# Altium PCB Seadream_PCB.PcbDoc
Units mil, origin at the board's own origin, x right, y up, seen from the top; angles counter-clockwise.
Board outline 2935 x 2105 mil, 4 copper layers (Top Layer, GND, 3V3, Bottom Layer), stack 23.756 mil thick; 61 components, 45 nets, 250 pads, 9 vias.
Unrouted connection lines stored in the file: 50.
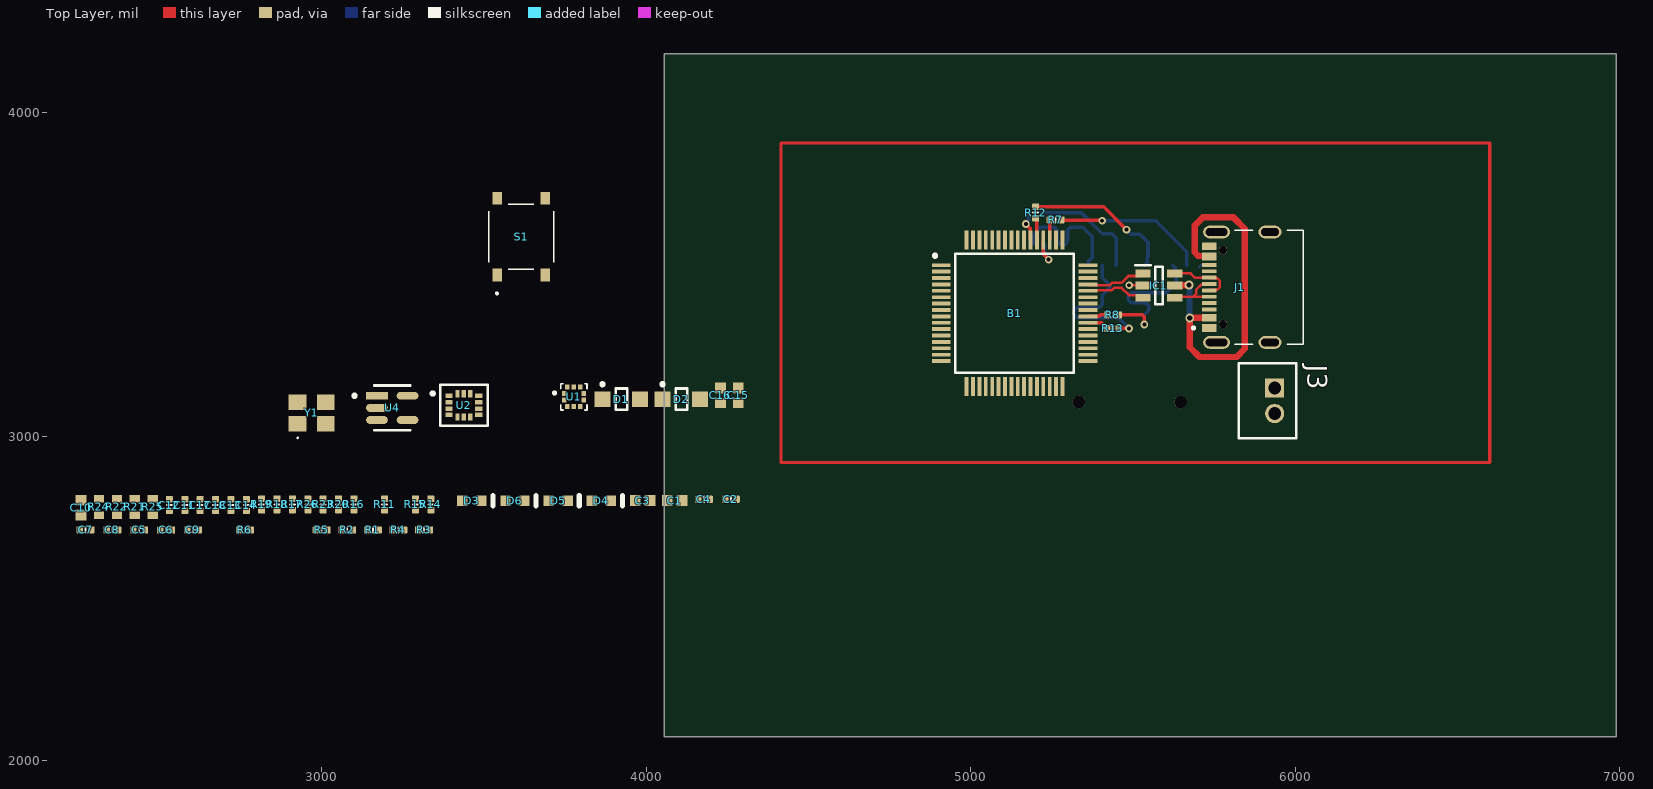
[diagram p0: Top Layer view]
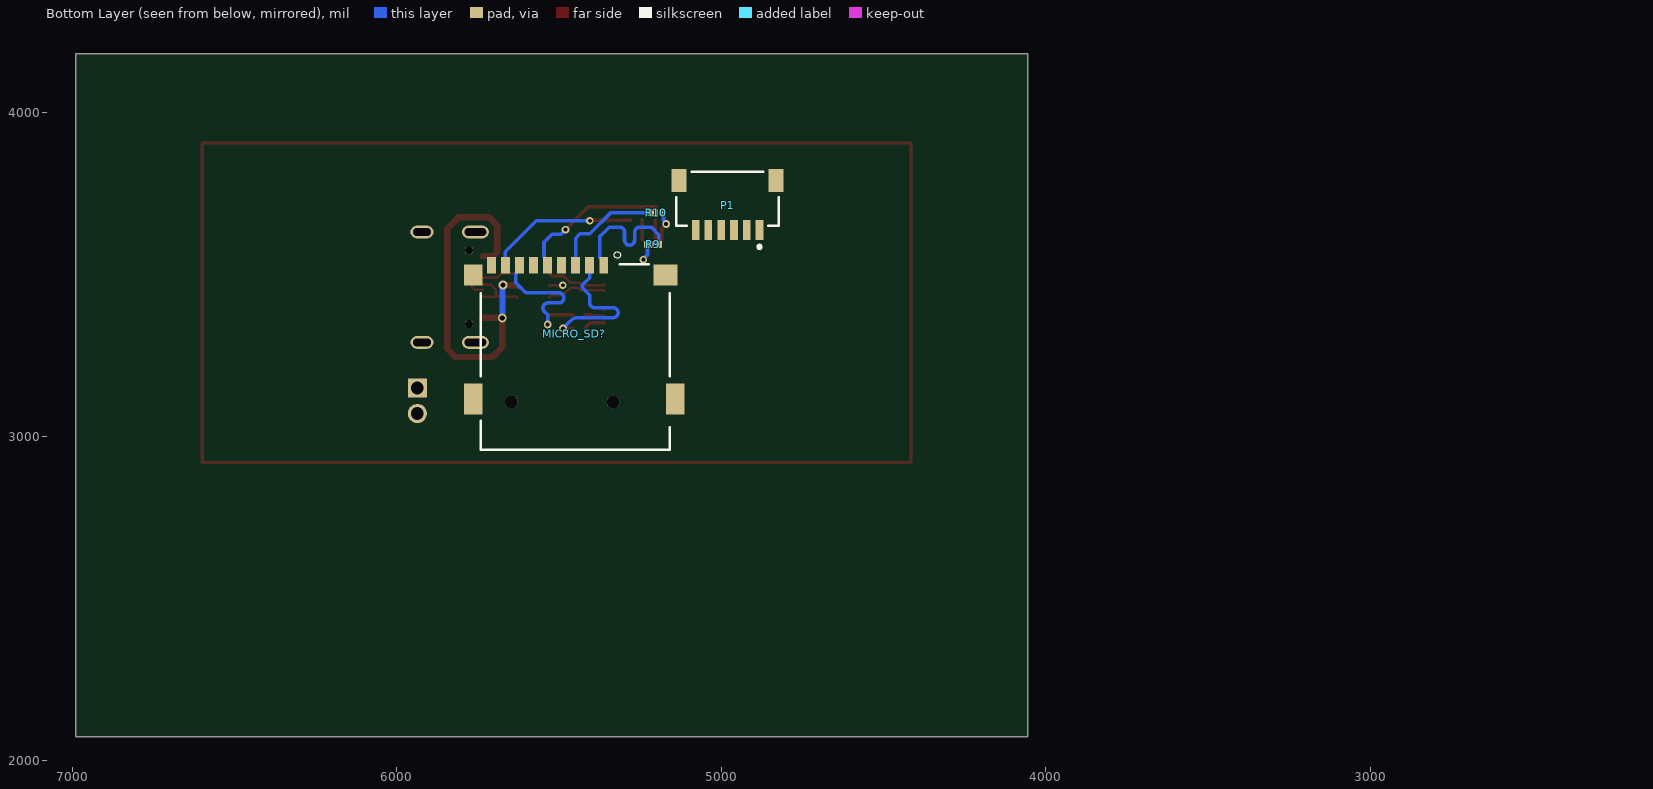
[diagram p1: Bottom Layer view, seen from below]
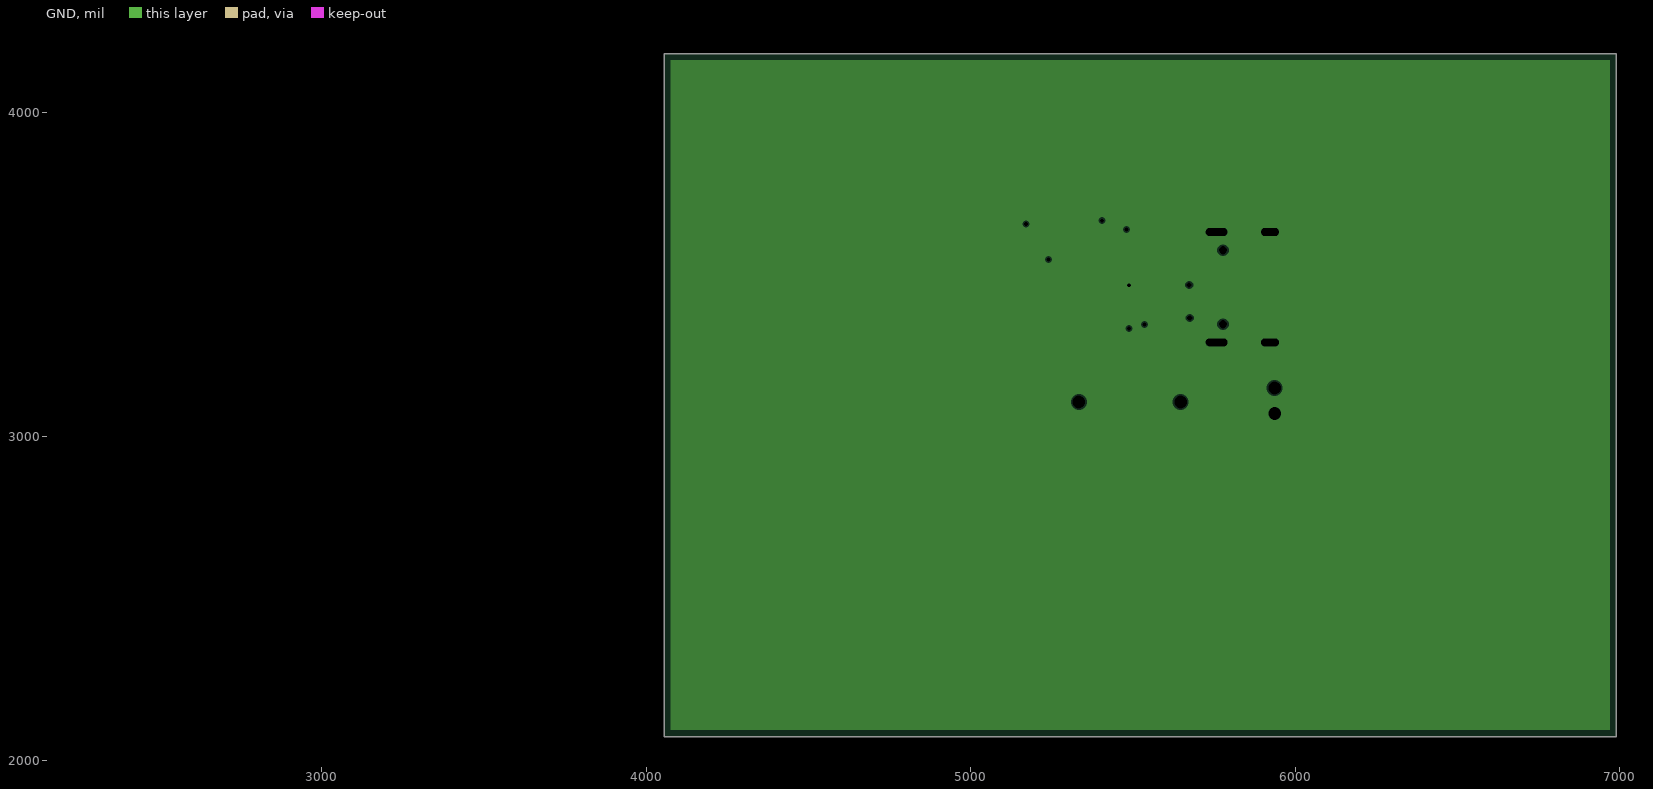
[diagram p2: GND, clearances drawn from the general rule]
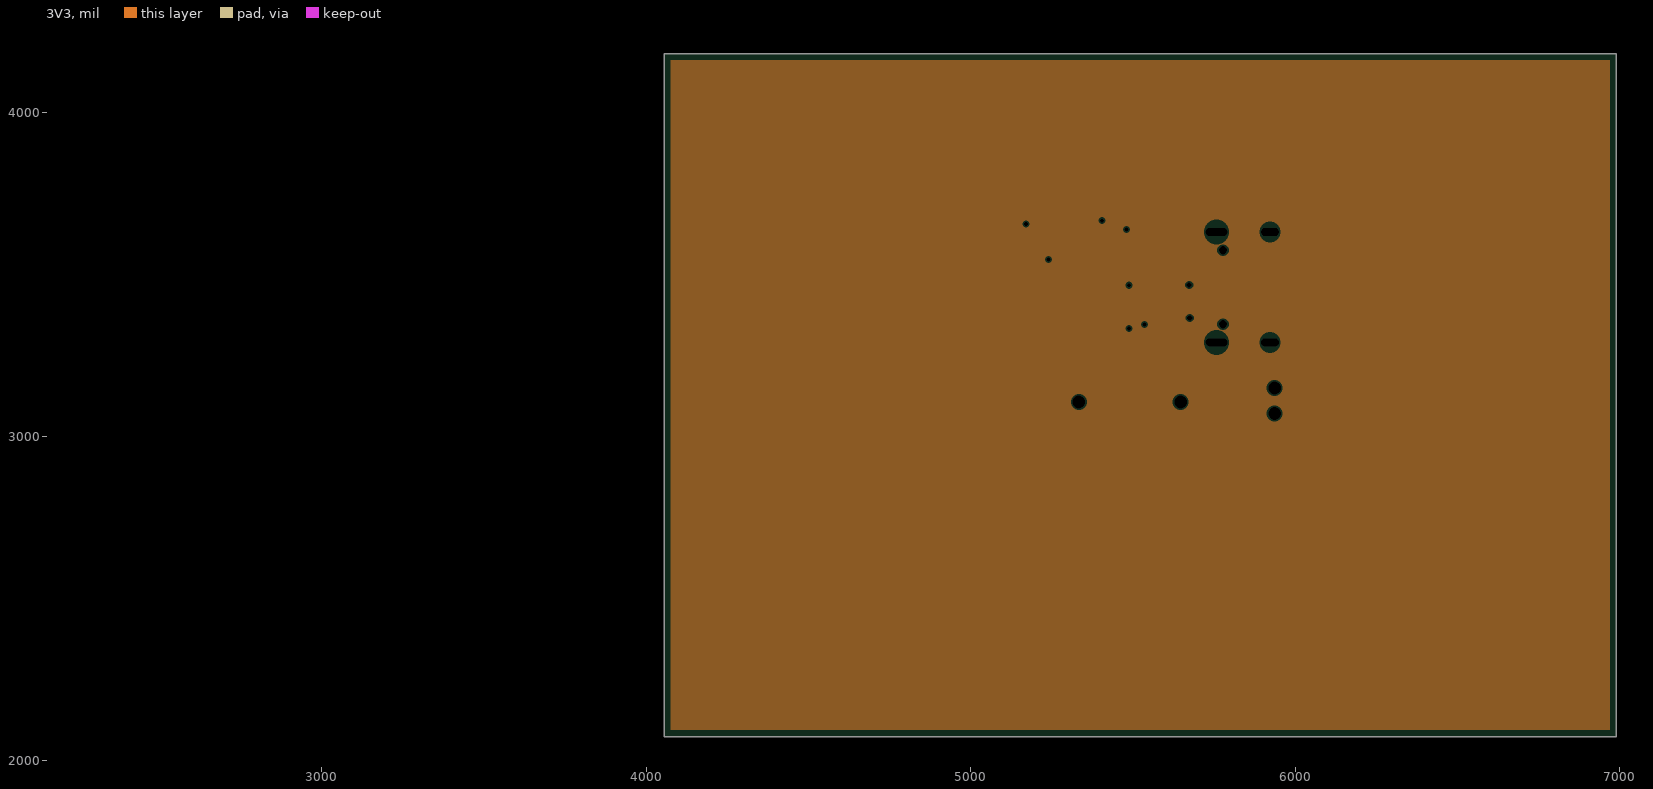
[diagram p3: 3V3, clearances drawn from the general rule]

## Layer stack, top to bottom
Top Solder: solder mask 0.4, Solder Resist, Dk 3.5
Top Layer: signal copper 1.4
Dielectric 2: prepreg 2.8, PP-006, Dk 4.1
GND: plane copper 1.378, net GND
Dielectric 1: dielectric 12.6, FR-4, Dk 4.8
3V3: plane copper 1.378, net 3V3
Dielectric 3: prepreg 2.8, PP-006, Dk 4.1
Bottom Layer: signal copper 1.4
Bottom Solder: solder mask 0.4, Solder Resist, Dk 3.5

## Board outline
4055,2075 4055,4180 6990,4180 6990,2075

## Design rules (kind name [scope] priority, off if disabled: settings)
BoardOutlineClearance [All] p1: gap=7.87 ignorepadtopadclearanceinfootprint=FALSE
Clearance SDMMC_1 [InNetClass('SDMMC')] p1: gap=8 ignorepadtopadclearanceinfootprint=TRUE except(9.84: Arc-Hole Track-Hole SMDPad-Hole THPad-Hole Via-Hole Fill-Hole Poly-Hole Region-Hole Text-Hole)
Clearance PWR_Clear [InNetClass('PWR')] p2: gap=8 ignorepadtopadclearanceinfootprint=TRUE except(9.84: Arc-Hole Track-Hole SMDPad-Hole THPad-Hole Via-Hole Fill-Hole Poly-Hole Region-Hole Text-Hole)
Clearance [All] p3: gap=6 ignorepadtopadclearanceinfootprint=TRUE except(9.84: Arc-Hole Track-Hole SMDPad-Hole THPad-Hole Via-Hole Fill-Hole Poly-Hole Region-Hole Text-Hole)
ComponentClearance [All] p1: gap=5 collisioncheckmode=3 verticalgap=5 showdistances=TRUE
DiffPairsRouting [All] p1: maxlimit=11.81 minlimit=7.09 mostfreqgap=7.09 toplayer_minwidth=7.87 toplayer_maxwidth=7.87 toplayer_prefwidth=7.87 bottomlayer_mingap=7.09 bottomlayer_minwidth=7.87 bottomlayer_maxwidth=7.87 bottomlayer_prefwidth=7.87 maxuncoupledlength=196.85
Height [All] p1: minheight=0 maxheight=71497.94 prefheight=500
HoleSize [All] p1: absolutevalues=TRUE maxlimit=248.03 minlimit=11.81 maxpercent=80.000 minpercent=20.000
HoleToHoleClearance [All] p1: gap=9.84 allowstackedmicrovias=FALSE
MatchedLengths USB_LENGTH [InxSignalClass('SDMMC')] p1: tolerance=3.94 checknetsindiffpair=FALSE checkdiffpairvsdiffpair=TRUE checkxsignals=TRUE checkothers=TRUE
MatchedLengths [InxSignalClass('SDMMC')] p2: tolerance=39.37 checknetsindiffpair=FALSE checkdiffpairvsdiffpair=TRUE checkxsignals=TRUE checkothers=TRUE
MinimumAnnularRing [All] p1: minimumring=3
MinimumSolderMaskSliver [All] p1: minsoldermaskwidth=0
PlaneClearance [All] p1: clearance=5
PlaneConnect PlaneConnectPowerPads [InPadClass('PowerPads')] p1: planeconnectstyle=Direct reliefexpansion=20 reliefentries=4 reliefconductorwidth=10 reliefairgap=10
PlaneConnect [All] p2: pad.planeconnectstyle=Relief pad.reliefexpansion=11.81 pad.reliefentries=4 pad.reliefconductorwidth=5 pad.reliefairgap=5 via.planeconnectstyle=Direct via.reliefexpansion=11.81 via.reliefentries=4 via.reliefconductorwidth=5 via.reliefairgap=5
PolygonConnect PolygonConnectPowerPads [All vs (InPadClass('PowerPads'))] p1: connectstyle=Direct reliefconductorwidth=10 reliefentries=4 polygonreliefangle="90 Angle" airgapwidth=10
PolygonConnect [All] p2: connectstyle=Relief reliefconductorwidth=5 reliefentries=4 polygonreliefangle="90 Angle" conductorbypadedge=TRUE mindistance=15 enablemindistance=FALSE airgapwidth=5
RoutingVias PWR_Vias [InNetClass('PWR')] p1: holewidth=15.75 width=27.56 viastyle="Through Hole" minholewidth=15.75 minwidth=27.56 maxholewidth=28 maxwidth=50
RoutingVias [All] p2: holewidth=11.81 width=23.62 viastyle="Through Hole" minholewidth=11.81 minwidth=23.62 maxholewidth=23.62 maxwidth=259.84
SilkToSilkClearance [All] p1: silktosilkclearance=0
SilkToSolderMaskClearance [IsPad] p1: minsilkscreentomaskgap=5 clearancetoexposedcopper=TRUE
SolderMaskExpansion [All] p1: expansion=2.95 istentingtop=FALSE
SupplyNets "Schematic Supply Nets_3" [InNet('GND')] p1: voltage=0.000
SupplyNets "Schematic Supply Nets_2" [InNet('VBAT')] p2: voltage=0.000
SupplyNets "Schematic Supply Nets_1" [InNet('3V3')] p3: voltage=0.000
SupplyNets "Schematic Supply Nets" [InNet('VIN')] p4: voltage=0.000
Width SDMMC [InNetClass('SDMMC')] p1: maxlimit=13.78 minlimit=9.84 preferedwidth=11.02 toplayer_minwidth=9.84 toplayer_maxwidth=13.78 toplayer_prefwidth=11.02 minimp=50.000000 maximp=50.000000 favimp=50.000000
Width PWR_Width [InNetClass('PWR')] p2: maxlimit=39.37 minlimit=11.81 preferedwidth=19.68 bottomlayer_maxwidth=39.37 minimp=50.000000 maximp=50.000000 favimp=50.000000
Width [All] p3: maxlimit=11.81 minlimit=5.91 preferedwidth=7.87 minimp=50.000000 maximp=50.000000 favimp=50.000000
20 further rules are at their usual default settings.

## Classes and differential pairs
net class SDMMC: CLK CMD DAT0 DAT1 DAT2 DAT3 SD_CK SD_CMD SD_D0 SD_D1 SD_D2 SD_D3
net class PWR: VBAT VIN
differential pair USB: +USB_P -USB_N
differential pair STM_USB: +STM_USB_P -STM_USB_N

## Components (designator, comment, footprint, x,y, rotation, side; value= is the part's Value field where it differs from the comment)
B1 "STM32U575RGT6" QFP50P1200X1200X160-64N 5135,3380 r0 top
C1 "Capacitor" CAPC1608X90X40LL10T20 4087.01,2802.45 r0 top value=2.2u
C2 "Capacitor" CAPC0402(1005)60_L 4260.55,2806.39 r0 top value=100n
C3 "Capacitor" CAPC1608X90X40LL10T20 3988.42,2802.45 r0 top value=4.7u
C4 "Capacitor" CAPC0402(1005)60_L 4177.71,2806.39 r0 top value=100n
C5 "Capacitor" CAPC0402(1005)60_L 2437.09,2711.74 r0 top value=100n
C6 "Capacitor" CAPC0402(1005)60_L 2519.92,2711.74 r0 top value=100n
C7 "Capacitor" CAPC0402(1005)60_L 2271.42,2711.74 r0 top value=100n
C8 "Capacitor" CAPC0402(1005)60_L 2354.25,2711.74 r0 top value=100n
C9 "Capacitor" CAPC0402(1005)60_L 2602.76,2711.74 r0 top value=100n
C10 "Capacitor" CAPC1608X90X40LL10T20 2257.64,2780.8 r90 top value=2.2u
C11 "Capacitor" CAPC0402(1005)60_L 2577.48,2788.67 r90 top value=100n
C12 "Capacitor" CAPC0402(1005)60_L 2530.08,2788.67 r90 top value=100n
C13 "Capacitor" CAPC0402(1005)60_L 2719.68,2788.67 r90 top value=100n
C14 "Capacitor" CAPC0402(1005)60_L 2767.09,2788.67 r90 top value=100n
C15 "Capacitor" CAPC1608X90X40LL10T20 4283.55,3126.43 r90 top value=4.7u
C16 "Capacitor" CAPC1608X90X40LL10T20 4228.28,3126.43 r90 top value=2.2u
C17 "Capacitor" CAPC0402(1005)60_L 2624.88,2788.67 r90 top value=18p
C18 "Capacitor" CAPC0402(1005)60_L 2672.28,2788.67 r90 top value=18p
D1 "SMF5.0AT1G" ONSC-SOD-123FL-2-498_V 3922.84,3115.2 r0 top
D2 "SMF5.0AT1G" ONSC-SOD-123FL-2-498_V 4108.04,3115.2 r0 top
D3 "Light-Emitting Diode" LTST-C191KRKT_V 3462.2,2801.47 r0 top
D4 "Light-Emitting Diode" LTST-C191KRKT_V 3861.3,2801.47 r0 top
D5 "Light-Emitting Diode" LTST-C191KRKT_V 3728.27,2801.47 r0 top
D6 "Light-Emitting Diode" LTST-C191KRKT_V 3595.23,2801.47 r0 top
IC1 "USBLC6-2SC6" SOT95P280X145-6N 5580,3465 r0 top
J1 "TYPE-C_16PIN_2MD_(073)" SHOUHAN_TYPE-C_16PIN_2MD_(073) 5880,3460 r90 top
J3 "B2B-PH-K-S(LF)(SN)" JST-B2B-PH-K-S_V 5915,3110 r270 top
MICRO_SD? "TF-01A" TF-01A 5450,3245 r180 bottom
P1 "SM06B-SRSS-TB(LF)(SN)" JST-SM06B-SRSS-TB_V 4980.59,3732.81 r0 bottom
R1 "Resistor" RESC0402(1005)_L 3157.01,2711.74 r0 top value=10k
R2 "Resistor" RESC0402(1005)_L 3078.11,2711.74 r0 top value=10k
R3 "Resistor" RESC0402(1005)_L 3314.8,2711.74 r0 top value=10k
R4 "Resistor" RESC0402(1005)_L 3235.91,2711.74 r0 top value=10k
R5 "Resistor" RESC0402(1005)_L 2999.21,2711.74 r0 top value=10k
R6 "Resistor" RESC0402(1005)_L 2762.52,2711.74 r0 top value=10k
R7 "Resistor" RESC0402(1005)_L 5261.7,3667.48 r180 top value=22
R8 "Resistor" RESC0402(1005)_L 5438.23,3374.91 r0 top value=22
R9 "Resistor" RESC0402(1005)_L 5209.82,3592.07 r0 bottom value=22
R10 "Resistor" RESC0402(1005)_L 5200,3690 r180 bottom value=22
R11 "Resistor" RESC0402(1005)_L 3193.7,2790.64 r90 top value=5k1
R12 "Resistor" RESC0402(1005)_L 5200,3690 r270 top value=22
R13 "Resistor" RESC0402(1005)_L 5438.23,3332.95 r180 top value=22
R14 "Resistor" RESC0402(1005)_L 3335.9,2790.64 r90 top value=5k1
R15 "Resistor" RESC0402(1005)_L 3288.5,2790.64 r90 top value=4k7
R16 "Resistor" RESC0402(1005)_L 3098.9,2790.64 r90 top value=4k7
R17 "Resistor" RESC0402(1005)_L 2909.29,2790.64 r90 top value=22
R18 "Resistor" RESC0402(1005)_L 2861.89,2790.64 r90 top value=10k
R19 "Resistor" RESC0402(1005)_L 2814.49,2790.64 r90 top value=22
R20 "Resistor" RESC0402(1005)_L 3051.5,2790.64 r90 top value=22
R21 "Resistor" RESC1608X55X25LL10T15 2423.46,2782.76 r90 top value=470
R22 "Resistor" RESC1608X55X25LL10T15 2368.19,2782.76 r90 top value=470
R23 "Resistor" RESC0402(1005)_L 3004.09,2790.64 r90 top value=10k
R24 "Resistor" RESC1608X55X25LL10T15 2312.91,2782.76 r90 top value=470
R25 "Resistor" RESC1608X55X25LL10T15 2478.74,2782.76 r90 top value=470
R26 "Resistor" RESC0402(1005)_L 2956.69,2790.64 r90 top value=10k
S1 "TS-1187A-B-A-B" TS1187ABAB 3614.16,3615.87 r90 top
U1 "BMP388" PQFN50P200X200X80-10N 3776.62,3122.09 r0 top
U2 "LSM6DSO32TR" FP-LGA-14L-DM00249496-MFG 3437.72,3095.91 r0 top
U4 "AP2112K-3.3TRG1" FP-SOT25-IPC_A 3216.93,3088.04 r0 top
Y1 "X32258MOB4SI" X32258MOB4SI 2968.58,3072.29 r0 top

## Footprints (in the part's own frame and the unit in brackets; to place one, negate y for a bottom-side part, rotate by r counter-clockwise, add the part's x,y. Pads: shape width x height; smd on the part's side, far side on the other; paste and mask are expansions set on the pad)
CAPC0402(1005)60_L [mm] "Chip Capacitor, Body 1.0x0.5mm, Height 0.6mm, IPC High Density"
  rrect25% 0.5x0.55 smd: 1(-0.45,0) 2(0.45,0)
  silkscreen extent 0,-0.2 0,0.2, body extent -0.5,-0.25 0.5,0.25, height 0.6
CAPC1608X90X40LL10T20 [mm] "Chip Capacitor, 2-Leads, Body 1.70x0.90mm, IPC High Density"
  rect 0.85x0.85 smd: 1(-0.575,0) 2(0.575,0)
  body extent -0.85,-0.45 0.85,0.45, height 0.9
FP-LGA-14L-DM00249496-MFG [mm]
  rect 0.575x0.35 smd paste-1000 mask+0: 1(-1.162,0.75) 2(-1.162,0.25) 3(-1.162,-0.25) 4(-1.162,-0.75) 8(1.162,-0.75) 9(1.162,-0.25) 10(1.162,0.25) 11(1.162,0.75)
  rect 0.35x0.575 smd paste-1000 mask+0: 5(-0.5,-0.913) 6(0,-0.913) 7(0.5,-0.913) 12(0.5,0.913) 13(0,0.913) 14(-0.5,0.913)
  silkscreen extent -2.57,-1.6 1.85,1.6, body extent -2.05,-1.8 2.05,1.8, height 0.25
FP-SOT25-IPC_A [mm]
  rect 1.707x0.616 smd paste+0 mask+0: 1(-1.201,0.95)
  rrect100% 1.707x0.616 smd paste+0 mask+0: 2(-1.201,0) 3(-1.201,-0.95) 4(1.201,-0.95) 5(1.201,0.95)
  silkscreen extent -3.08,-1.75 1.4,1.75, body extent -2.55,-2 2.55,2, height 0.25
JST-B2B-PH-K-S_V [mm] "Connector, 2-Leads, Body 5.9x4.5mm, Pitch 2mm"
  rect 1.5x1.5 hole 1: 1(-1,0.55)
  round 1.5 hole 1: 2(1,0.55)
  silkscreen extent -2.95,-2.25 2.95,2.25, body extent -2.95,-2.25 2.95,2.25, height 6
JST-SM06B-SRSS-TB_V [mm] "SMD, 6-Leads, Body 8x4.25mm, Pitch 1mm"
  rect 0.6x1.55 smd: 1(-2.5,2.45) 2(-1.5,2.45) 3(-0.5,2.45) 4(0.5,2.45) 5(1.5,2.45) 6(2.5,2.45)
  rect 1.2x1.8 smd: MP1(-3.8,-1.425) MP2(3.8,-1.425)
  silkscreen extent -4,-2.12 4,3.9, body extent -4,-2.12 4,2.83, height 2.96
LTST-C191KRKT_V [mm] "SMD, 2-Leads, Body 1.6x0.8mm"
  rect 0.8x0.8 smd: 1(-0.75,0) 2(0.75,0)
  silkscreen extent 1.65,-0.4 1.65,0.4, body extent -0.8,-0.4 0.8,0.4, height 0.9
ONSC-SOD-123FL-2-498_V [mm] "SOD, 2-Leads, Body 2.7x1.65mm"
  rect 1.25x1.22 smd: 1(-1.475,0) 2(1.475,0)
  silkscreen extent -1.6,-0.82 0.45,1.28, body extent -1.35,-0.82 1.35,0.82, height 0.98
PQFN50P200X200X80-10N [mm]
  rrect9% 0.35x0.38 smd: 1(-0.765,0.25) 2(-0.765,-0.25) 3(-0.5,-0.765) 4(0,-0.765) 5(0.5,-0.765) 6(0.765,-0.25) 7(0.765,0.25) 8(0.5,0.765) 9(0,0.765) 10(-0.5,0.765)
  silkscreen extent -1.6,-1.03 1.03,1.03, body extent -1,-1 1,1, height 0.8
QFP50P1200X1200X160-64N [mm]
  rect 1.475x0.3 smd: 1(-5.738,3.75) 2(-5.738,3.25) 3(-5.738,2.75) 4(-5.738,2.25) 5(-5.738,1.75) 6(-5.738,1.25) 7(-5.738,0.75) 8(-5.738,0.25) 9(-5.738,-0.25) 10(-5.738,-0.75) 11(-5.738,-1.25) 12(-5.738,-1.75) 13(-5.738,-2.25) 14(-5.738,-2.75) 15(-5.738,-3.25) 16(-5.738,-3.75) 33(5.738,-3.75) 34(5.738,-3.25) 35(5.738,-2.75) 36(5.738,-2.25) 37(5.738,-1.75) 38(5.738,-1.25) 39(5.738,-0.75) 40(5.738,-0.25) 41(5.738,0.25) 42(5.738,0.75) 43(5.738,1.25) 44(5.738,1.75) 45(5.738,2.25) 46(5.738,2.75) 47(5.738,3.25) 48(5.738,3.75)
  rect 0.3x1.475 smd: 17(-3.75,-5.738) 18(-3.25,-5.738) 19(-2.75,-5.738) 20(-2.25,-5.738) 21(-1.75,-5.738) 22(-1.25,-5.738) 23(-0.75,-5.738) 24(-0.25,-5.738) 25(0.25,-5.738) 26(0.75,-5.738) 27(1.25,-5.738) 28(1.75,-5.738) 29(2.25,-5.738) 30(2.75,-5.738) 31(3.25,-5.738) 32(3.75,-5.738) 49(3.75,5.738) 50(3.25,5.738) 51(2.75,5.738) 52(2.25,5.738) 53(1.75,5.738) 54(1.25,5.738) 55(0.75,5.738) 56(0.25,5.738) 57(-0.25,5.738) 58(-0.75,5.738) 59(-1.25,5.738) 60(-1.75,5.738) 61(-2.25,5.738) 62(-2.75,5.738) 63(-3.25,5.738) 64(-3.75,5.738)
  silkscreen extent -6.35,-4.65 4.65,4.65, body extent -6,-6 6,6, height 1.6
RESC0402(1005)_L [mm] "Chip Resistor, Body 1.0x0.5mm, IPC High Density"
  rrect25% 0.5x0.55 smd: 1(-0.45,0) 2(0.45,0)
  silkscreen extent 0,-0.2 0,0.2, body extent -0.5,-0.25 0.5,0.25, height 0.3
RESC1608X55X25LL10T15 [mm] "Chip Resistor, 2-Leads, Body 1.70x0.90mm, IPC High Density"
  rect 0.6x0.8 smd: 1(-0.65,0) 2(0.65,0)
  body extent -0.85,-0.45 0.85,0.45, height 0.55
SHOUHAN_TYPE-C_16PIN_2MD_(073) [mm]
  rect 0.6x1.15 smd paste+0 mask+0: A1_B12(-3.2,3.67) A4_B9(-2.4,3.67) B1_A12(3.2,3.67) B4_A9(2.4,3.67)
  rect 0.3x1.15 smd paste+0 mask+0: A5(-1.25,3.67) A6(-0.25,3.67) A7(0.25,3.67) A8(1.25,3.67) B5(1.75,3.67) B6(0.75,3.67) B7(-0.75,3.67) B8(-1.75,3.67)
  oval 1x1.8 hole 0.6 slot 1.4 at 90 deg mask+0.102: SH1(-4.32,-1.075) SH2(4.32,-1.075)
  oval 1x2.1 hole 0.6 slot 1.7 at 90 deg mask+0.102: SH3(-4.32,3.105) SH4(4.32,3.105)
  round 0.65 hole 0.65 unplated mask+0: ""(-2.89,2.605) ""(2.89,2.605)
  silkscreen extent -4.47,-3.67 4.47,5.02, body extent -4.47,-3.67 4.47,3.98, height 3.26
SOT95P280X145-6N [mm]
  rect 1.2x0.6 smd: 1(-1.25,0.95) 2(-1.25,0) 3(-1.25,-0.95) 4(1.25,-0.95) 5(1.25,0) 6(1.25,0.95)
  silkscreen extent -1.85,-1.46 0.3,1.6, body extent -1.4,-1.46 1.4,1.46, height 1.45
TF-01A [mm]
  rect 0.7x1.3 smd: 1(2.23,7.174) 2(1.13,7.174) 3(0.03,7.174) 4(-1.07,7.174) 5(-2.17,7.174) 6(-3.27,7.174) 7(-4.37,7.174) 8(-5.47,7.174) CD1(-6.57,7.174)
  rect 1.448x1.651 smd: MP1(-7.989,6.4)
  rect 1.448x2.438 smd: MP2(-7.989,-3.3) MP3(7.836,-3.3)
  rect 1.854x1.651 smd: MP4(7.061,6.4)
  round 1 hole 1 unplated: ""(-5.004,-3.531) ""(2.972,-3.531)
  silkscreen extent -7.4,-7.26 7.4,8.24, body extent -8.1,-7.22 8,7.98, height 2
TS1187ABAB [mm]
  rect 1x0.75 smd: A1(-3,1.875) B1(3,1.875) C1(-3,-1.875) D1(3,-1.875)
  silkscreen extent -4.5,-2.55 2.55,2.55, body extent -3.2,-2.55 3.3,2.55, height 1.5
X32258MOB4SI [mm]
  rect 1.4x1.2 smd: 1(-1.1,-0.85) 2(1.1,-0.85) 3(1.1,0.85) 4(-1.1,0.85)
  silkscreen extent -1.15,-2 -1.05,-1.9, body extent -1.68,-1.33 1.68,1.33, height 0.9

## Part data
B1: "Ultra-low-power Arm Cortex-M33 32-bit MCU+TrustZone+FPU, 240 DMIPS, up to 2 MB Flash memory, 786 KB SRAM", Manufacturer_Name=STMicroelectronics, Datasheet Link=https://www.st.com/resource/en/datasheet/stm32u575ag.pdf, Geometry.Height=1.6mm, Manufacturer_Part_Number=STM32U575RGT6
C1 C10 C16: "2.2u Capacitor 0603 CL10A225KO8NNNC", SimulationGenericComponent=True
C2 C4 C5 C6 C7 C8 C9 C11 C12 C13 C14: "100n Capacitor 0402 CL05B104KO5NNNC", SimulationGenericComponent=True
C3 C15: "4.7u Capacitor 0603 CL10A475KO8NNNC", SimulationGenericComponent=True
C17 C18: "18p Capacitor 0402 0402CG180J500NT", SimulationGenericComponent=True
D1 D2: library part CMP-1061-00612-1, "200 W Transient Voltage Suppressor, 2-Pin SOD-123FL, Pb-Free, Tape and Reel", Manufacturer="On Semiconductor", ComponentLink1Description="Manufacturer URL", ComponentLink1URL=http://www.onsemi.com/, ComponentLink2Description=Datasheet, ComponentLink2URL=http://www.onsemi.com/pub_link/Collateral/SMF5.0AT1-D.PDF, ComponentLink3Description="Package Specification", ComponentLink3URL=http://www.onsemi.com/pub_link/Collateral/498-01.PDF, DatasheetVersion="Rev. 7", Direction=Unidirectional, IR Max (uA)=400, Mounting Technology="Surface Mount", PackageDescription="2-Pin SOD, Body 1.65 x 2.7 mm", PackageReference=SOD-123FL-2-498, PackageVersion="Rev. D, 05/2013", Packing="Tape and Reel", PartNumber=SMF5.0AT1G, RoHS=Pb-Free, V(BR) Typ (V)=6.7
D3 D4 D5 D6: library part LED, "Red Light-Emitting Diode 0603 KT-0603R", AF=1, BV=0, BV_MAX=1e99, CJO=0, CJP=0, CTA=0, CTP=0, EG=1.11, FC=0.5, FCS=0.5, FV_MAX=1e99, IBV=0.001, IKF=0, IKR=0, IS=1e-14, ISR=1e-14, JSW=0, JTUN=0, JTUNSW=0, KEG=1, KF=0, LEVEL=1, MJSW=0.33, N=1, NBV=1, NR=1, NS=1, NTUN=30, PHP=1, RS=0, SimulationGenericComponent=True, TCV=0, TLEV=0, TLEVC=0, TM1=0, TM2=0, TNOM=27, TPB=0, TPHP=0, TRS=0, TRS2=0, TT=0, TTT1=0, TTT2=0, VJ=1, XTI=3, XTITUN=3
IC1: "Integrated Circuit", Manufacturer_Name=STMicroelectronics, Mouser Part Number=511-USBLC6-2SC6, Arrow Part Number=USBLC6-2SC6, Arrow Price/Stock=https://www.arrow.com/en/products/usblc6-2sc6/stmicroelectronics?utm_currency=USD&region=europe, Datasheet Link=https://www.st.com/resource/en/datasheet/usblc6-2.pdf, Height=1.45mm, Manufacturer_Part_Number=USBLC6-2SC6, Mouser Price/Stock=https://www.mouser.co.uk/ProductDetail/STMicroelectronics/USBLC6-2SC6?qs=po45yt2pPpu%2FhNIlwQdTlg%3D%3D
J1: library part CMP-025-000000-1, "DC-5V 5A Type C USB", Package=Package, Check_prices=https://www.snapeda.com/parts/TYPE-C%2016PIN%202MD%20(073)/Shouhan/view-part/?ref=eda, Component Type=Standard, Design Item ID=TYPE-C_16PIN_2MD_(073), MF=Shouhan, MP="TYPE-C 16PIN 2MD (073)", Pin Count=16, SnapEDA_Link=https://www.snapeda.com/parts/TYPE-C%2016PIN%202MD%20(073)/Shouhan/view-part/?ref=snap, Source=TYPE-C_16PIN_2MD_(073).SchLib
J3: library part CMP-2000-05162-1, "Male Header, Pitch 2 mm, 1 x 2 Position, Height 6 mm, Tail Length 3.4 mm, -25 to 85 degC, RoHS, Bulk", Manufacturer=JST, Datasheet URL=http://datasheet.octopart.com/B2B-PH-K-S%28LF%29%28SN%29-JST-datasheet-8324864.pdf, Datasheet Version=Nov-08, Manufacturer URL=http://www.jst.com/home2.html, No of Positions=2, Pitch=2mm, Style/Orientation=StraightHeader/Plug, Termination=Crimp, Type=ShroudedHeader
MICRO_SD?: library part CMP-029-000000-4, "Standard Card Edge Connectors", Package=Package, Availability="Not in stock", Check_prices=https://www.snapeda.com/parts/TF-01A/HRO+Electronics+Co.%252C+Ltd./view-part/?ref=eda, Component Type=Standard, Design Item ID=TF-01A, MF="HRO Electronics Co., Ltd.", MP=TF-01A, Pin Count=13, Price=None, SnapEDA_Link=https://www.snapeda.com/parts/TF-01A/HRO+Electronics+Co.%252C+Ltd./view-part/?ref=snap, Source=TF-01A.SchLib
P1: library part CMP-2000-07080-1, "Male Header, Pitch 1 mm, 1 x 6 Position, Height 2.95 mm, -25 to 85 degC, RoHS, Tape and Reel", Manufacturer=JST, Package Description="Male Header, Pitch 1 mm, 1 X 6 Position, Height 2.9 mm", Package Reference=SM06B-SRSS-TB, Datasheet URL=https://datasheet.ciiva.com/26894/getdatasheetpartid-708885-26894671.pdf, Datasheet Version=11/2010, Manufacturer URL=http://www.jst.com/home2.html, Mounting Technology=SurfaceMount, No of Positions=6, Pitch=1mm, Style/Orientation=RightAngleHeader/Plug, Termination=Solder, Type=ShroudedHeader
R1 R2 R3 R4 R5 R6 R18 R23 R26: "10k Resistor 0402 0402WGF1002TCE", SimulationGenericComponent=True, TC1=0, TC2=0
R7 R8 R9 R10 R12 R13 R17 R19 R20: "22 Resistor 0402 0402WGF220JTCE", SimulationGenericComponent=True, TC1=0, TC2=0
R11 R14: "5k1 Resistor 0402 0402WGF5101TCE", SimulationGenericComponent=True, TC1=0, TC2=0
R15 R16: "4k7 Resistor 0402 0402WGF4701TCE", SimulationGenericComponent=True, TC1=0, TC2=0
R21 R22 R24 R25: "470 Resistor 0603 0603WAF4700T5E", SimulationGenericComponent=True, TC1=0, TC2=0
S1: "Switch", Manufacturer_Name="XKB Connectivity", Datasheet Link=http://www.helloxkb.com/public/images/pdf/TS-1187A-X-X-X.pdf, Height=4.05mm, Manufacturer_Part_Number=TS-1187A-B-A-B
U1: library part CMP-031-00007-2, "P-Sensor SPI I2C 1, 25 Bar SMD", Case/Package=None, Availability=Unavailable, Component Type=Standard, Design Item ID=BMP388, MP=BMP388, Pins=10, Price=None, Source=BMP388.SchLib
U2: library part CMP-12177-000015-1, "INEMO INERTIAL MODULE: 3D ACCELE"
U4: library part CMP-12756-000035-1, "IC REG LINEAR 3.3V 600MA SOT25", Case/Package=SOT-23-5, Dropout Voltage=250mV, Max Input Voltage=6V, Max Operating Temperature=85°C, Max Output Current=600mA, Min Input Voltage=2.5V, Min Operating Temperature=-40°C, Output Voltage=3.3V, Package Quantity=1, Quiescent Current=55uA, Accuracy=1.5%, Height=1.3mm, Lead Free="Lead Free", Length=3.1mm, Mount="Surface Mount", Number of Outputs=1, Number of Pins=5, Number of Regulators=1, Output Current=600mA, Output Type=Fixed, Packaging="Tape and Reel", Polarity=Positive, Width=1.7mm
Y1: "Crystal or Oscillator", Manufacturer_Name=YXC, Datasheet Link=https://item.szlcsc.com/datasheet/X32258MOB4SI/2777872.html, Height=0.8mm, Manufacturer_Part_Number=X32258MOB4SI

## Via types
v1: diameter 23.62, hole 11.81, Top Layer to Bottom Layer, 7 vias
v2: diameter 27.56, hole 15.75, Top Layer to Bottom Layer, 2 vias

## Nets (pads, with @x,y where several pads share a name; then routed paths per layer and width w, separated by ;. In a path a pad name is that pad's centre, name@x,y a point inside that pad or via, vN(x,y) a via of type N, cw(c..) or ccw(c..) an arc to the next point about the centre after c; other vN are vias at no path point)
"3.3V LED": D5.1 R24.2
3V3: B1.1 B1.12 B1.19 B1.32 B1.48 B1.64 C1.2 C2.2 C3.2 C4.2 C5.2 C6.2 C7.2 C8.2 C9.2 C11.2 C12.2 C13.2 C14.2 C15.2 MICRO_SD?.4 P1.1 R1.1 R2.1 R3.1 R4.1 R5.1 R6.2 R15.2 R16.2 R18.2 R23.2 R24.1 U1.1 U1.6 U1.10 U2.2 U2.3 U2.5 U2.8 U4.5
BARO_INT: B1.10 U1.7
BARO_SCL: B1.8 R15.1 U1.2
BARO_SDA: B1.9 R16.1 U1.4
BOOT0: B1.60 R26.1
CC1: J1.A5 J1.B5 R11.2 R14.2
CLK: MICRO_SD?.5 R12.1 | length 466.2
  Top Layer w11.02: R12.1@5200.98,3707.72 5409.7,3707.72 v1(5480,3637.41)
  Bottom Layer w11.02: v1(5480,3637.41) 5493.86,3623.55 5521.45,3623.55 5546.29,3598.71 5546.29,3553.97 5543.71,3551.39 5543.71,3535.7 MICRO_SD?.5
CMD: MICRO_SD?.3 R5.2 R10.1 | length 347.6
  Bottom Layer w11.02: R10.1 5340,3690 5405,3625 5435.16,3625 5448.83,3611.34 MICRO_SD?.3
DAT0: MICRO_SD?.2 R1.2 R13.1 | length 461.9
  Top Layer w11.02: R13.1 v1(5487.95,3332.95)
  Bottom Layer w11.02: MICRO_SD?.2 5405.52,3489.48 5427.88,3467.12 5427.88,3457.99 5405.52,3435.63 5405.52,3412.56 cw(c5390.01,3412.56) 5390.01,3397.05 5333.53,3397.05 ccw(c5333.53,3381.54) 5333.53,3366.02 5443.9,3366.02 cw(c5443.9,3339.54) 5462.62,3358.27 5468.14,3352.76 v1(5487.95,3332.95)
DAT1: MICRO_SD?.7 R2.2 R8.2 | length 472.3
  Top Layer w11.02: R8.2 5460.23,3374.91 5460.28,3374.95 5528.54,3374.95 5535,3368.5 v1(5535,3345)
  Bottom Layer w11.02: v1(5535,3345) 5535,3375 5545.06,3385.06 ccw(c5534.09,3396.02) 5534.09,3411.54 5500.53,3411.54 cw(c5500.53,3427.05) 5500.53,3442.56 5596.14,3442.56 ccw(c5596.14,3458.07) 5607.1,3447.1 5622.06,3462.06 5632.11,3472.11 5633.7,3473.7 5633.7,3500.62 5630.32,3503.99 5630.32,3519.17 MICRO_SD?.7
DAT2: MICRO_SD?.8 R3.2 R7.1 | length 468.7
  Top Layer w11.02: R7.1 5280.65,3666.24 5403.76,3666.24 v1(5405,3665)
  Bottom Layer w11.02: v1(5405,3665) 5570,3665 5665.36,3569.64 MICRO_SD?.8
DAT3: MICRO_SD?.1 R4.2 R9.1 | length 410.7
  Bottom Layer w11.02: R9.1@5192.1,3593.05 5192.1,3622.11 5215,3645 5251.54,3645 cw(c5251.54,3629.49) 5267.05,3629.49 5267.05,3605.2 ccw(c5282.56,3605.2) 5298.07,3605.2 5298.07,3629.49 cw(c5313.58,3629.49) 5313.58,3645 5345,3645 5360.23,3629.77 5375,3615 5375,3552.03 5362.21,3539.24 MICRO_SD?.1
GND: B1.13 B1.18 B1.31 B1.47 B1.63 C1.1 C2.1 C3.1 C4.1 C5.1 C6.1 C7.1 C8.1 C9.1 C10.1 C11.1 C12.1 C13.1 C14.1 C15.1 C16.1 C17.1 C18.1 D1.2 D2.2 D3.2 D4.2 D5.2 D6.2 IC1.2 J1.A1_B12 J1.B1_A12 J1.SH1 J1.SH2 J1.SH3 J1.SH4 J3.2 MICRO_SD?.6 MICRO_SD?.MP1 MICRO_SD?.MP2 MICRO_SD?.MP3 MICRO_SD?.MP4 P1.3 P1.MP1 P1.MP2 R11.1 R14.1 R26.2 S1.D1 U1.3 U1.5 U1.8 U1.9 U2.6 U2.7 U4.2 Y1.2 Y1.4 | length 43.1
  Top Layer w7.87: v1(5488.1,3465.95) 5529.84,3465.95 IC1.2
HSE_IN: B1.5 C17.2 Y1.1
HSE_OUT: B1.6 C18.2 Y1.3
IMU_CS: B1.24 R18.1 U2.12
IMU_INT: B1.20 U2.4
IMU_MISO: B1.22 R17.1
IMU_MOSI: B1.23 R20.2
IMU_SCK: B1.21 R19.2
LSM_MISO: R17.2 U2.1
LSM_MOSI: R20.1 U2.14
LSM_SCK: R19.1 U2.13
NetB1_30: B1.30 C10.2
NRST: B1.7 P1.5 R23.1 S1.B1
SD_CK: B1.53 R12.2 | length 60
  Top Layer w11.02: R12.2@5202.99,3665.51 5202.99,3639.98 5203.63,3639.34 5203.63,3606.17 B1.53
SD_CMD: B1.54 R10.2 | length 95.1
  Top Layer w11.02: v1(5170,3655) 5170,3654.48 5183.94,3640.54 5183.94,3606.17 B1.54
  Bottom Layer w11.02: v1(5170,3655) 5170,3658.41 5177.95,3666.36 5177.95,3685.67 R10.2
SD_D0: B1.39 R13.2 | length 67.4
  Top Layer w11.02: B1.39 5402.99,3350.47 5415.2,3338.26 5416.18,3338.26 5420.51,3333.93 R13.2
SD_D1: B1.40 R8.1 | length 61.2
  Top Layer w11.02: B1.40@5361.17,3370.43 5395.54,3370.43 5400.02,3374.91 R8.1
SD_D2: B1.51 R7.2 | length 61.9
  Top Layer w11.02: B1.51 5243.54,3606.17 5243.54,3667.04 R7.2
SD_D3: B1.52 R9.2 | length 119.9
  Top Layer w11.02: B1.52 5223.58,3562.28 5240,3545.86 v1(5240,3545)
  Bottom Layer w11.02: R9.2 5227.54,3560.87 5240,3548.41 v1(5240,3545)
SD_DET: B1.41 MICRO_SD?.CD1 R6.1 | length 8.5
  Top Layer w7.87: B1.41 B1.41@5362.87,3391.81
  Bottom Layer w7.87: MICRO_SD?.CD1@5704.64,3523.41 MICRO_SD?.CD1
STM_USB_N: B1.44 IC1.3 | length 186.3
  Top Layer w7.87: B1.44 5362.87,3450.87 5394.83,3450.87 5395.23,3451.26 5434.86,3451.26 5441.68,3458.07 5465.22,3458.07 5487.82,3435.47 5522.91,3435.47 IC1.3
STM_USB_P: B1.45 IC1.1 | length 185.8
  Top Layer w7.87: B1.45 5362.87,3466.61 5394.83,3466.61 5395.23,3466.22 5428.67,3466.22 5435.48,3473.03 5464.43,3473.03 5485.93,3494.53 5522.91,3494.53 IC1.1
SWCLK: B1.49 P1.2
SWDIO: B1.46 P1.4
SWO: B1.55 P1.6
USB_N: IC1.4 J1.A7 J1.B7 | length 181
  Top Layer w7.87: IC1.4 5632.09,3430.47 5685.47,3430.47 ; J1.B7 5685.47,3430.47 ; J1.A7 5733.54,3467.87 5710.63,3467.87 5695,3452.24 5695,3440 5685.47,3430.47
USB_P: IC1.6 J1.A6 J1.B6 | length 204.8
  Top Layer w7.87: IC1.6 5677.4,3502.4 5690.28,3489.53 J1.B6 5737.48,3487.56 5760.39,3487.56 5768.09,3479.86 5768.09,3459.82 5760.39,3452.13 5737.48,3452.13 J1.A6
VBAT: C16.2 D1.1 D2.1 IC1.5 J1.A4_B9 J1.B4_A9 J3.1 R21.1 R22.1 U4.1 U4.3 | length 1173.8
  Top Layer w19.68: IC1.5 5630.12,3465.9 5672.29,3465.9 v2(5673.19,3466.81) ; J1.A4_B9 5735.26,3365.26 5675.26,3365.26 v2(5675,3365) 5675,3275 5705,3245 5820,3245 5845,3270 5845,3640 5810,3675 5715,3675 5690,3650 5690,3567.99 5701.66,3556.33 5733.67,3556.33 J1.B4_A9
  Bottom Layer w19.68: v2(5673.19,3466.81) 5674.1,3465.9 5674.1,3365.9 v2(5675,3365)
VBAT_LED: D4.1 R22.2
VBUS_LED: D3.1 R21.2
VIN: R25.1
"VIN LED": D6.1 R25.2
pads on no net: B1.2 B1.3 B1.4 B1.11 B1.14 B1.15 B1.16 B1.17 B1.25 B1.26 B1.27 B1.28 B1.29 B1.33 B1.34 B1.35 B1.36 B1.37 B1.38 B1.42 B1.43 B1.50 B1.56 B1.57 B1.58 B1.59 B1.61 B1.62 J1. J1.A8 J1.B8 MICRO_SD?. S1.A1 S1.C1 U2.9 U2.10 U2.11 U4.4
copper on no net: | length 6338.5
  Top Layer w10: 4415,2920 6600,2920 6600,3904.25 4415,3904.25 4415,2920

## Polygon pours and split planes (outlines as drawn)
GND on GND (split plane): 6969.9,2095.1 4075.1,2095.1 4075.1,4159.9 6969.9,4159.9
3V3 on 3V3 (split plane): 6969.9,2095.1 4075.1,2095.1 4075.1,4159.9 6969.9,4159.9